# Altium PCB Function-Generator.PcbDoc (part 2 of 2)
Units mm, origin at the board's own origin, x right, y up, seen from the top; angles counter-clockwise.
Board outline 70 x 70 mm, 2 copper layers (Top Layer, Bottom Layer), stack 1.569 mm thick; 87 components, 40 nets, 246 pads, 57 vias.
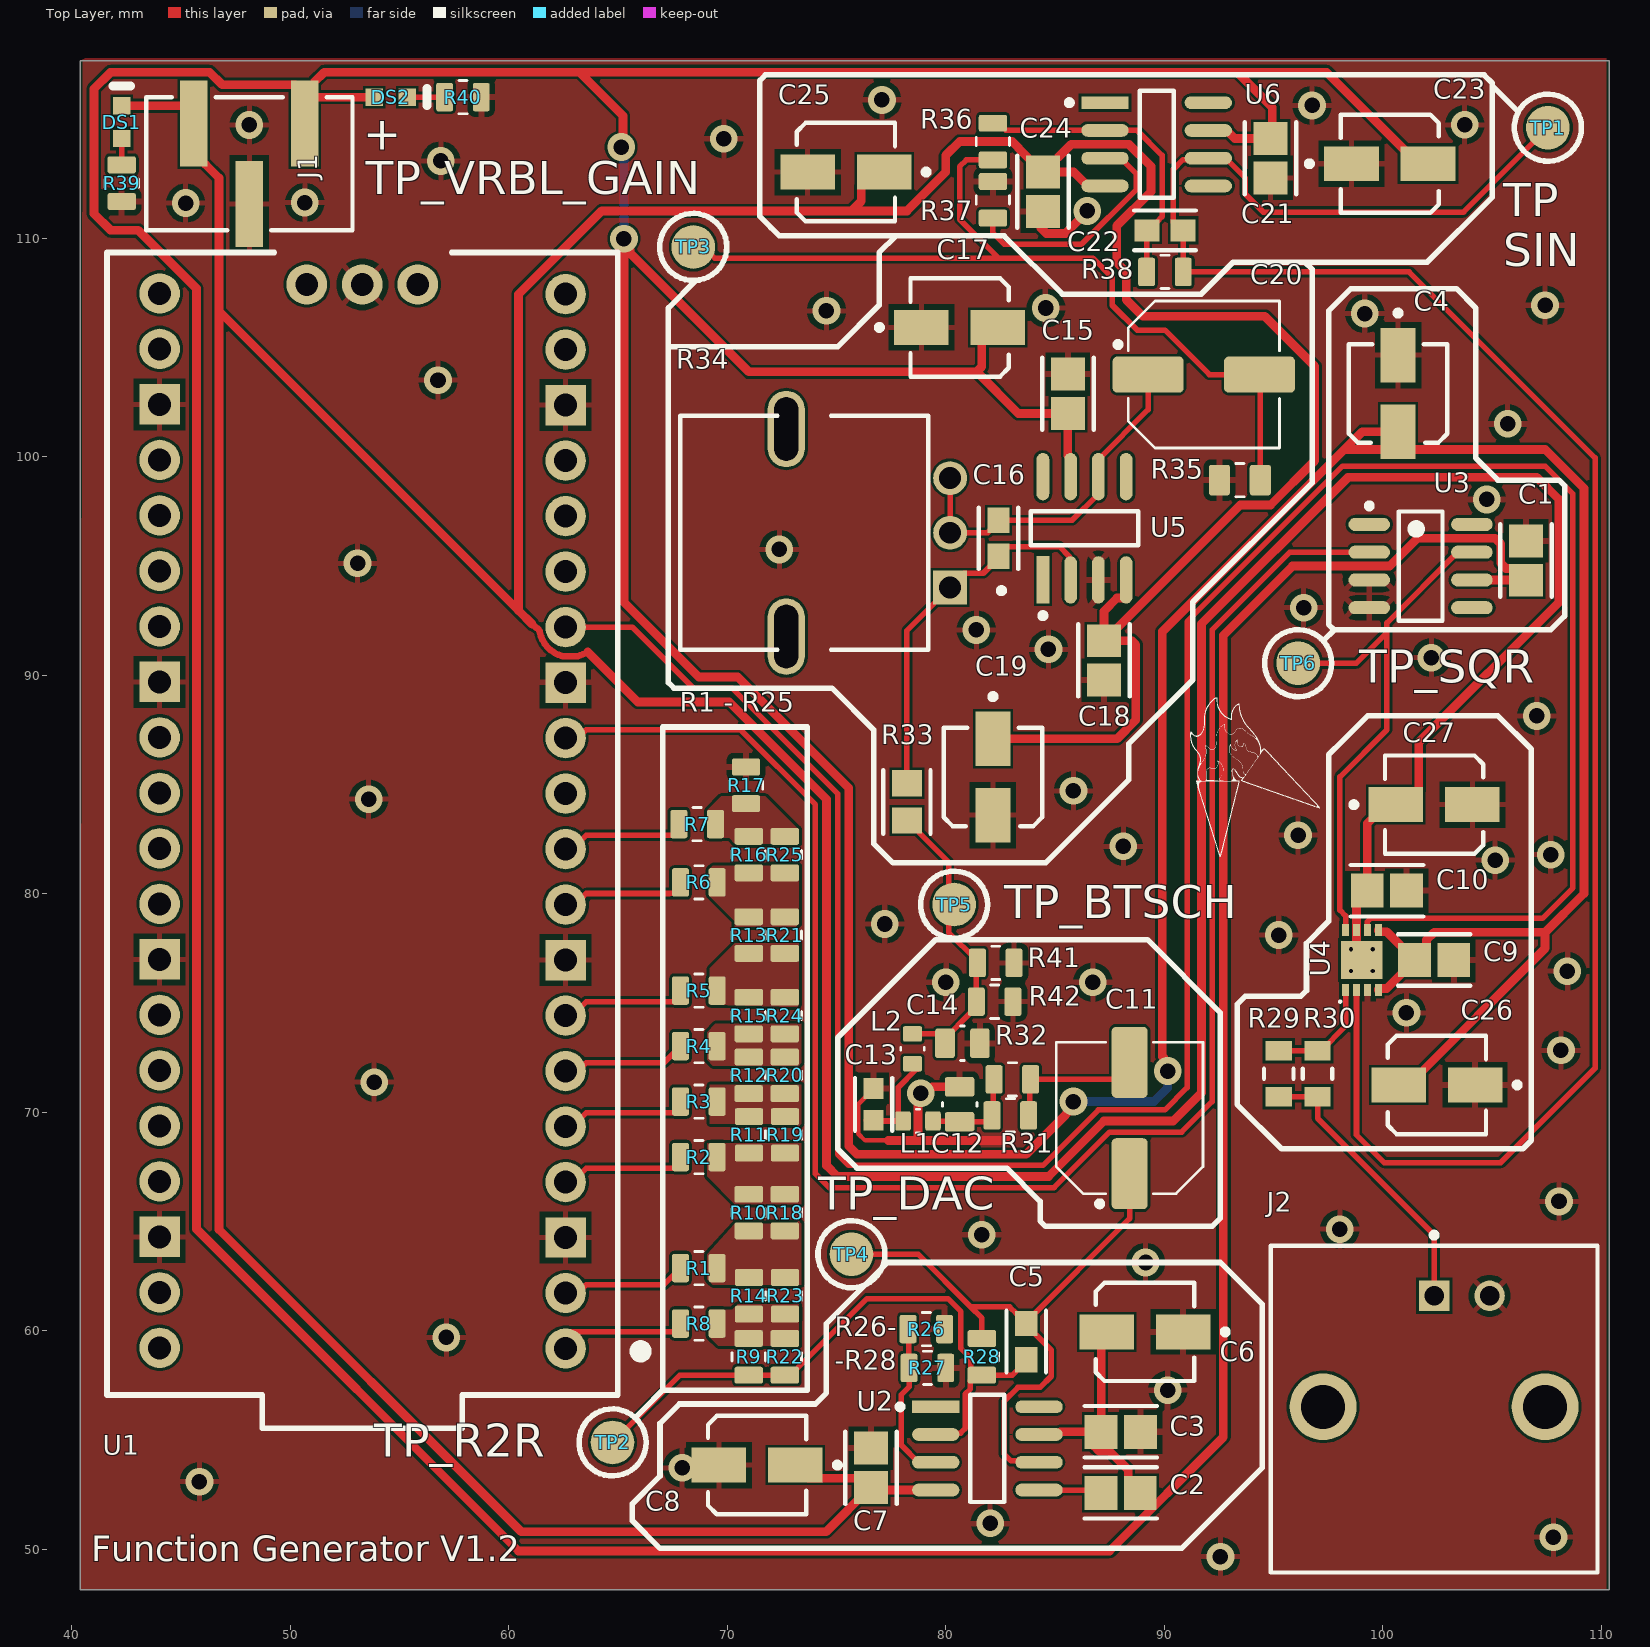
[diagram p0: Top Layer view]

## Via types
v1: diameter 1.27, hole 0.711, Top Layer to Bottom Layer, 53 vias
v2: diameter 0.5, hole 0.2, Top Layer to Bottom Layer, 4 vias

## Nets (pads, with @x,y where several pads share a name; then routed paths per layer and width w, separated by ;. In a path a pad name is that pad's centre, name@x,y a point inside that pad or via, vN(x,y) a via of type N, cw(c..) or ccw(c..) an arc to the next point about the centre after c; other vN are vias at no path point) (continued)
VCC: (continued)
  Top Layer w0.4: J1.3@51.108,117.148 51.562,117.602 93.345,117.602 ; DS2.1 51.108,116.459 50.673,116.024 J1.3 50.673,116.586 50.238,117.021 46.89,117.021 46.309,117.602 41.783,117.602 41.021,116.84 41.021,111.125 41.783,110.363 43.053,110.363 45.72,107.696 45.72,64.643 60.452,49.911 87.503,49.911 92.71,55.118 92.71,91.821 95.885,94.996 100.33,94.996 101.6,96.266 105.156,96.266 105.41,96.012 105.41,95.123 105.644,94.889 106.03,94.889 C1.1@106.557,94.361 ; 63.246,117.602 65.24,115.608 65.24,114.262 v1(65.151,114.173) ; v1(65.278,109.982) v1@65.278,109.747 ; C17.2 82.261,105.918 81.661,105.318 81.661,104.12 81.427,103.886 ; U2.7 85.121,55.245 85.248,55.372 C3.1 ; U5.7 85.725,99.931 85.598,100.058 C15.1 83.332,101.981 81.427,103.886 ; v1(85.852,70.485) 85.852,70.25 85.506,69.903 85.506,69.885 83.693,68.072 75.946,68.072 75.565,68.453 75.565,84.836 70.485,89.916 68.707,89.916 65.278,93.345 v1@65.278,109.747 ; C6.2 87.122,59.69 C3.1 ; C2.2 88.359,53.13 88.359,53.627 87.503,54.483 87.033,54.483 86.799,54.717 86.799,55.049 C3.1 ; v1(90.17,71.882) 90.004,72.048 90.004,72.464 89.916,72.551 89.916,91.996 98.25,100.33 ; U6.7 92.868,114.935 93.238,114.566 C21.1 94.957,114.654 94.957,115.99 93.345,117.602 ; U4.4 99.81,75.622 99.85,75.662 100.187,75.662 101.461,76.936 C9.1 ; U4.5 99.81,78.302 99.85,78.262 100.187,78.262 101.461,76.988 C9.1 ; C4.2 99.068,101.148 98.25,100.33 ; C26.2 101.189,71.247 107.442,77.5 107.442,78.232 ; C23.2 101.63,113.411 97.439,117.602 93.345,117.602 ; U3.6 C1.1@106.557,94.361 ; C1.1 C1.1@106.557,94.361 ; v1@65.278,109.747 65.561,109.464 65.561,109.318 70.993,103.886 81.427,103.886 ; 98.25,100.33 107.442,100.33 109.22,98.552 109.22,80.01 107.442,78.232 ; C9.1 102.014,77.514 102.014,77.884 102.362,78.232 107.442,78.232
  Bottom Layer w0.4: v1(65.151,114.173) 65.278,114.046 v1(65.278,109.982) ; v1(85.852,70.485) 89.535,70.485 90.17,71.12 v1(90.17,71.882)
VEE: C7.1 C8.1 C10.1 C18.1 C19.1 C24.1 C25.1 C27.1 DS1.2 J1.1 U2.4 U4.7 U4.9 U5.4 U6.4 | length 339.6
  Top Layer w0.3: 61.214,92.202 cw(c61.137,91.912) 61.349,92.124 cw(c61.137,91.912) 61.431,91.971 ccw(c62.816,92.242) 62.475,90.873 ccw(c62.816,92.242) 62.513,90.864 63.12,90.864 ccw(c62.816,92.242) 63.158,90.873 ccw(c62.816,92.242) 63.394,90.954 63.627,91.059
  Top Layer w0.4: DS1.2 J1.1@45.158,116.066 ; J1.1 45.593,113.916 46.748,112.761 46.748,106.668 ; 61.087,92.329 60.452,92.964 ; 63.627,91.059 65.913,88.773 70.104,88.773 74.549,84.328 74.549,67.564 75.057,67.056 84.709,67.056 87.249,69.596 90.424,69.596 91.715,70.887 91.715,92.35 98.425,99.06 107.061,99.06 108.077,98.044 108.077,93.345 101.662,86.93 101.662,84.674 101.062,84.074 C27.1 100.162,84.074 99.302,83.214 C10.1 98.806,79.641 98.806,78.341 U4.7 98.81,77.637 98.635,77.462 v2(98.56,77.462) ; C8.1 73.724,53.248 76.152,53.248 C7.1 ; C25.1 76.738,113.03 76.138,112.43 76.138,111.698 75.692,111.252 ; U2.4 76.695,52.705 C7.1 ; C19.1 87.856,87.094 88.709,87.947 88.709,91.4 88.531,91.579 C18.1@87.515,91.579 ; U6.4 86.505,112.395 85.87,113.03 C24.1@84.481,113.03 ; U5.4 88.265,93.617 88.181,93.533 87.851,93.533 87.249,92.931 C18.1 C18.1@87.515,91.579 ; 46.748,106.668 60.452,92.964 ; 46.748,106.668 46.748,64.631 60.579,50.8 74.535,50.8 76.555,52.82 C7.1 ; 60.452,92.964 60.452,107.442 64.262,111.252 75.692,111.252 ; 75.692,111.252 78.232,111.252 80.01,113.03 80.01,113.792 80.645,114.427 83.058,114.427 83.341,114.144 83.341,114.118 84.429,113.03 C24.1 C24.1@84.481,113.03 ; C24.1@84.481,113.03 85.751,114.3 88.392,114.3 89.408,113.284 89.408,112.141 87.836,110.569 87.836,108.887 88.265,108.458 88.265,107.188 89.027,106.426 94.615,106.426 96.901,104.14 96.901,99.822 94.869,97.79 93.486,97.79 87.515,91.819 C18.1@87.515,91.579
  other v2: 98.56,76.462 99.56,76.462 99.56,77.462
pads on no net: J2.3 J2.4 R34.4 R34.5 U1.11 U1.15 U1.16 U1.17 U1.19 U1.20 U1.21 U1.22 U1.24 U1.25 U1.26 U1.27 U1.29 U1.30 U1.31 U1.32 U1.34 U1.35 U1.36 U1.37 U1.39 U1.40 U1.41 U1.43 U2.1 U2.8 U3.1 U3.5 U3.8 U5.1 U5.5 U5.8 U6.1 U6.5 U6.8

## Polygon pours and split planes (outlines as drawn)
GND on Top Layer "NONET_L-01_P-001" (solid, remove dead copper, pour order 22): 40.513,118.364 40.64,118.237 110.236,118.237 110.236,48.133 40.386,48.133
NetR8_2 on Top Layer "NONET_L-01_P-001" (solid, pour order 21): 69.215,60.96 70.231,60.96 70.485,61.214 73.279,61.214 73.279,59.182 73.152,59.309 69.596,59.309 69.215,59.69
NetR1_2 on Top Layer "NONET_L-01_P-001" (solid, pour order 20): 70.358,64.897 73.152,64.897 73.279,65.024 73.406,64.897 73.406,62.103 69.342,62.103 69.088,62.357 69.088,63.5
NetR2_2 on Top Layer "NONET_L-01_P-001" (solid, pour order 19): 69.088,68.58 73.406,68.58 73.406,65.786 70.358,65.786 69.088,67.056 69.088,67.31
NetR3_2 on Top Layer "NONET_L-01_P-001" (solid, pour order 18): 69.215,71.247 73.406,71.247 73.406,69.469 73.279,69.342 73.152,69.469 69.215,69.469
NetR4_2 on Top Layer "NONET_L-01_P-001" (solid, pour order 17): 69.088,72.39 69.342,72.136 73.279,72.136 73.406,72.263 73.406,74.041 69.469,74.041 69.088,73.66
NetR5_2 on Top Layer "NONET_L-01_P-001" (solid, pour order 16): 69.088,74.93 69.215,75.057 69.215,76.581 70.358,77.724 73.279,77.724 73.279,74.803
NetR7_2 on Top Layer "NONET_L-01_P-001" (solid, pour order 15): 69.723,84.455 69.088,83.82 69.088,82.55 70.104,82.55 70.358,82.296 73.279,82.296 73.279,82.931 71.755,84.455
NetR6_2 on Top Layer "NONET_L-01_P-001" (solid, pour order 14): 69.215,81.153 69.342,81.28 73.279,81.28 73.279,78.613 73.152,78.486 70.358,78.486 70.358,78.74 69.215,79.883
GND on Bottom Layer "NONET_L-01_P-001" (solid, pour order 24): 40.64,118.237 110.236,118.237 110.236,48.133 40.476,48.133 40.386,48.223
VEE on Bottom Layer "NONET_L-01_P-001" (solid, pour order 23): 97.282,78.232 97.282,75.692 100.711,75.692 100.711,78.359

## Silkscreen, mask and mechanical layers (free items; w line width, h text height)
Top Overlay:
  drawing of 100 lines, arcs and shapes, not listed
  text "+" at 53.34,114.046 h1.52
  text "TP_VRBL_GAIN" at 53.467,112.014 h1.52
  text "TP / SIN" at 105.537,108.712 h1.52
  text "TP_SQR" at 98.933,89.662 h1.52
  text "R1 - R25" at 67.838,88.038 h1.52
  text "TP_BTSCH" at 82.677,78.867 h1.52
  text "TP_DAC" at 74.168,65.532 h1.52
  text "R26-  / -R28" at 74.93,57.912 h1.52
  text "TP_R2R" at 53.848,54.229 h1.52
  text "Function Generator V1.2" at 40.894,49.046 h2
Mechanical 1:
  the board outline again, w0.254